# EAGLE board Diagrama-Eduproto (EAGLE 7.5.0)
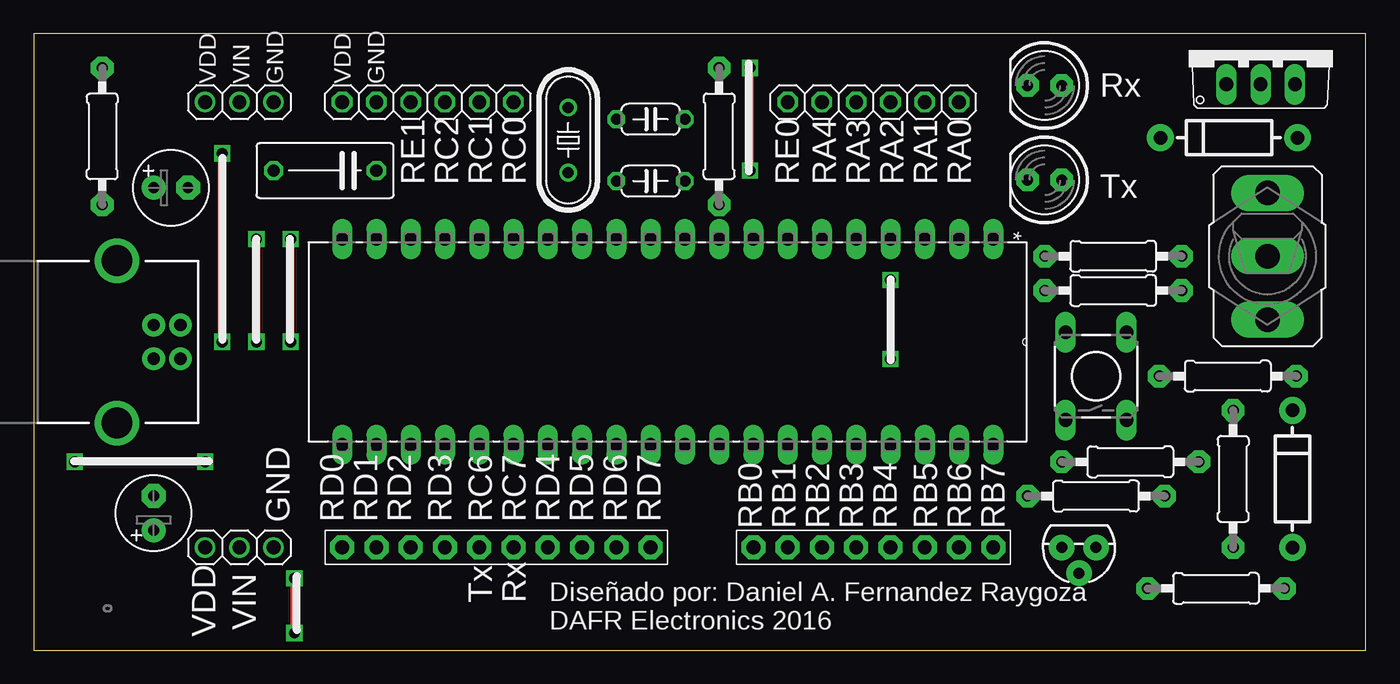
[diagram p0: board, top side]
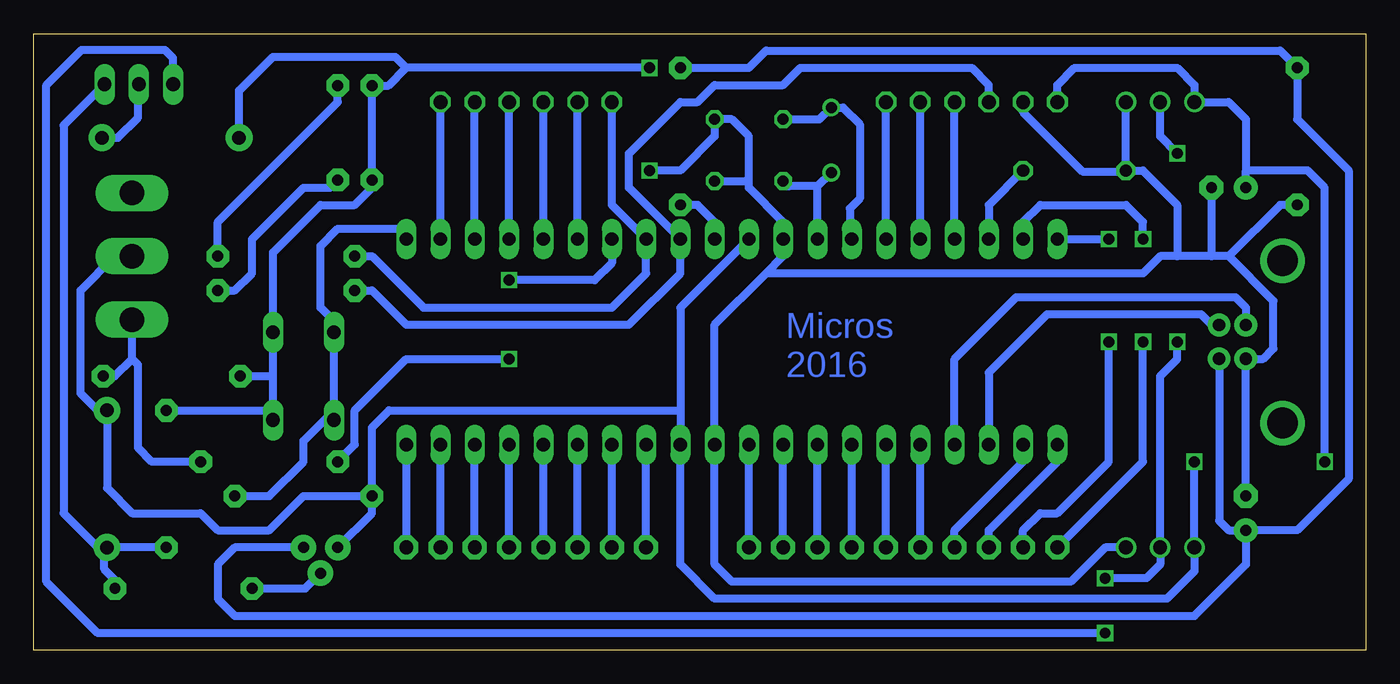
[diagram p1: board, bottom side, seen from below]

Size 98.73 x 45.71 mm. Coordinates in mm from the lower left corner, seen from the top.
Outline: 0,0 98.73,0 98.73,45.71 0,45.71 0,0
Copper layers (1*16): Top 0.035mm / dielectric 1.5mm / Bottom 0.035mm
Design rules "default": minimum track width 10mil, minimum drill 24mil, track to track 8mil, track to pad 8mil, pad to pad 8mil, via to via 8mil, smd to smd 8mil, copper to edge 40mil, drill to drill 8mil, minimum pad ring 10mil, minimum via ring 8mil, stop-mask expansion 4mil, vias tented up to drill 0mil, thermal gap 10mil

## Footprints (pad centres in the part's own frame; a part is rotated, then mirrored left to right if it is on the bottom)
E2,5-6 = drill 0.813 pad 1.778: + -1.27,0 | drill 0.813 pad 1.778 octagon: - 1.27,0
C050-024X044 = drill 0.813 octagon: 1 -2.54,0; 2 2.54,0
C075-042X103 = drill 0.914 octagon: 1 -3.81,0; 2 3.81,0
DIODE-1N4001 = drill 1 pad 1.981: A -5.08,0; C 5.08,0
TO220V = drill 1.016 long: 1 -2.54,-2.54; 2 0,-2.54; 3 2.54,-2.54
USB-B-PTH = drill 0.914 pad 1.676: D+ 0,1.25; D- 1.981,1.25; GND 0,-1.25; VBUS 1.981,-1.25 | drill 2.286: S1 -2.718,-6.02; S2 -2.718,6.02
1X08-BIG = drill 1.016 pad 1.778 octagon: 1 -8.89,0; 2 -6.35,0; 3 -3.81,0; 4 -1.27,0; 5 1.27,0; 6 3.81,0; 7 6.35,0; 8 8.89,0
1X06 = drill 1.016 octagon: 1 -6.35,0; 2 -3.81,0; 3 -1.27,0; 4 1.27,0; 5 3.81,0; 6 6.35,0
1X03 = drill 1.016: 1 -2.54,0; 2 0,0; 3 2.54,0
LED5MM = drill 0.813 pad 1.676 octagon: A -1.27,0; K 1.27,0
HC49/S = drill 0.813: 1 -2.413,0; 2 2.413,0
TO-92 = drill 0.813 pad 1.88: 1 -1.27,0; 2 0,1.905; 3 1.27,0
0207/10 = drill 0.813 pad 1.676 octagon: 1 -5.08,0; 2 5.08,0
M9040P = drill 1.803 long: 1 0,4.699; 2 0,0; 3 0,-4.699
DIP254P1524X635-40 = drill 0.991 long: 1 -15.24,48.26; 2 -15.24,45.72; 3 -15.24,43.18; 4 -15.24,40.64; 5 -15.24,38.1; 6 -15.24,35.56; 7 -15.24,33.02; 8 -15.24,30.48; 9 -15.24,27.94; 10 -15.24,25.4; 11 -15.24,22.86; 12 -15.24,20.32; 13 -15.24,17.78; 14 -15.24,15.24; 15 -15.24,12.7; 16 -15.24,10.16; 17 -15.24,7.62; 18 -15.24,5.08; 19 -15.24,2.54; 20 -15.24,0; 21 0,0; 22 0,2.54; 23 0,5.08; 24 0,7.62; 25 0,10.16; 26 0,12.7; 27 0,15.24; 28 0,17.78; 29 0,20.32; 30 0,22.86; 31 0,25.4; 32 0,27.94; 33 0,30.48; 34 0,33.02; 35 0,35.56; 36 0,38.1; 37 0,40.64; 38 0,43.18; 39 0,45.72; 40 0,48.26
TAC-SWITCH-PTH = drill 1.016 pad 1.524 long: 1 -3.251,2.261; 2 3.251,2.261; 3 -3.251,-2.261; 4 3.251,-2.261
1X10-BIG = drill 1.016 pad 1.778 octagon: 1 -11.43,0; 2 -8.89,0; 3 -6.35,0; 4 -3.81,0; 5 -1.27,0; 6 1.27,0; 7 3.81,0; 8 6.35,0; 9 8.89,0; 10 11.43,0

## Placement (x,y rotation side)
C1  10uF  [E2,5-6]  8.89,10.16 90 top
C2  1uF  [E2,5-6]  10.16,34.29 0 top
C3  22pF  [C050-024X044]  45.72,39.37 0 top
C4  22pF  [C050-024X044]  45.72,34.79 0 top
C5  220nF  [C075-042X103]  21.59,35.56 180 top
D1  [DIODE-1N4001]  88.59,38 180 top
D2  [DIODE-1N4001]  93.3,12.7 90 top
IC1  7805TV  [TO220V]  90.94,44.5 0 top
JP1  USB-B  [USB-B-PTH]  8.89,22.86 0 top
JP2  [1X08-BIG]  62.23,7.62 0 top
JP4  [1X06]  62.23,40.64 180 top
JP5  [1X06]  29.21,40.64 180 top
JP6  [1X03]  15.24,40.64 0 top
JP7  [1X03]  15.24,7.62 0 top
LED1  [LED5MM]  74.93,34.87 180 top
LED2  [LED5MM]  74.93,41.87 180 top
Q1  4MHz  [HC49/S]  39.62,37.83 90 top
Q2  [TO-92]  77.47,7.62 180 top
R1  1K  [0207/10]  88.9,12.7 270 top
R2  1K  [0207/10]  87.63,4.58 180 top
R3  100K  [0207/10]  5.08,38.1 90 top
R4  100K  [0207/10]  50.8,38.1 270 top
R6  330  [0207/10]  80.01,26.67 180 top
R7  330  [0207/10]  80.01,29.21 180 top
R8  10K  [0207/10]  88.5,20.32 180 top
R9  4.7K  [0207/10]  78.74,11.43 0 top
R10  10K  [0207/10]  81.28,13.97 180 top
S2  [M9040P]  91.44,29.21 180 top
U$1  PIC18F4553-I/P  [DIP254P1524X635-40]  22.86,15.24 270 top
U$2  TACTILE-SWITCH-PTH  [TAC-SWITCH-PTH]  78.74,20.32 90 top
U$3  PINHD-1X10  [1X10-BIG]  34.29,7.62 0 top
U$4  [LOGO]  1.75,2.75 0 top

## Library data of the parts
C1-C5 JP2 JP4-JP7 LED1 LED2 R1-R4 R6-R10 U$3 = adafruit
D1 D2 Q2 = SparkFun-DiscreteSemi
IC1 = linear
JP1 = SparkFun-Connectors; PROD_ID: CONN-08278
Q1 = adafruit; OC_FARNELL: 1667008; OC_NEWARK: unknown
S2 = switch
U$1 = PIC 18F4553; DESCRIPTION: USB Microcontrollers; MPN: PIC18F4553-I/P; OC_FARNELL: 1579608; OC_NEWARK: 54M5025; PACKAGE: DIP-40; SUPPLIER: Microchip
U$2 = GeekAmmo
U$4 = microchip

## Nets
AUTORUN: R10.2 U$1.7
D+: JP1.D+ U$1.24
D-: JP1.D- U$1.23
EN: Q2.2 R2.2
GND: C1.- C2.- C3.2 C4.2 C5.2 D1.C JP1.GND JP5.5 JP6.3 JP7.3 LED1.K LED2.K R1.1 R3.1 R8.2 U$1.12 U$1.31 U$2.3 U$2.4
N$2: D1.A IC1.2
N$3: R8.1 R10.1 S2.1
N$4: D2.A IC1.3 R1.2 R2.1
N$11: LED1.A R6.1
N$12: LED2.A R7.1
OSC1: C4.1 Q1.1 U$1.13
OSC2: C3.1 Q1.2 U$1.14
RA0: JP4.1 U$1.2
RA1: JP4.2 U$1.3
RA2: JP4.3 U$1.4
RA3: JP4.4 U$1.5
RA4: JP4.5 U$1.6
RB0: JP2.1 U$1.33
RB1: JP2.2 U$1.34
RB2: JP2.3 U$1.35
RB3: JP2.4 U$1.36
RB4: JP2.5 U$1.37
RB5: JP2.6 U$1.38
RB6: JP2.7 U$1.39
RB7: JP2.8 U$1.40
RC0: JP5.1 U$1.15
RC1: JP5.2 U$1.16
RC2: JP5.3 U$1.17
RC6: U$1.25 U$3.5
RD0: U$1.19 U$3.1
RD1: U$1.20 U$3.2
RD2: U$1.21 U$3.3
RD3: U$1.22 U$3.4
RD4: U$1.27 U$3.7
RD5: U$1.28 U$3.8
RD6: U$1.29 U$3.9
RD7: U$1.30 U$3.10
RESET: R9.2 U$1.1 U$2.1 U$2.2
RXLED: JP4.6 R7.2 U$1.8
RXPLL: U$1.26 U$3.6
SENSEUSB: R4.2 U$1.10
TXLED: JP5.4 R6.2 U$1.9
VBUS: C1.+ JP1.VBUS Q2.1 R3.2 R4.1
VDD: C2.+ D2.C JP5.6 JP6.1 JP7.1 Q2.3 R9.1 S2.2 U$1.11 U$1.32
VIN: IC1.1 JP6.2 JP7.2
VUSB: C5.1 U$1.18

## Tracks (layer width: path | path; a pad name or v marks a point on that pad's centre or on a via)
AUTORUN  (via drill 0.8)
  Top 0.61: v63.5,27.44 v63.5,21.59
  Bottom 0.61: U$1.7 55.88,28.71 57.15,27.44 v63.5,27.44 | R10.2 74.93,15.24 74.93,17.78 71.12,21.59 v63.5,21.59
D+
  Bottom 0.61: U$1.24 30.48,21.59 25.9,26.17 9.66,26.17 8.89,25.4 JP1.D+
D-
  Bottom 0.61: JP1.D- 11.41,24.11 12.2,24.9 23.63,24.9 27.94,20.59 U$1.23
EN
  Bottom 0.61: R2.2 78.61,4.58 Q2.2
GND  (via drill 0.8)
  Top 0.61: v53.09,35.56 v53.09,43.18
  Bottom 0.61: U$2.3 81,17.78 | 81,17.78 81,20.32 | 81,20.32 U$2.4 81,29.49 77.47,33.02 74.93,33.02 73.66,34.29 LED1.K LED2.K 72.43,41.87 71.12,43.18 | 45.72,35 45.72,34.29 43.18,31.75 U$1.12 43.18,29.21 44.45,27.94 | 45.72,35 45.72,38.1 46.99,39.37 C3.2 48.26,38.1 50.8,35.56 v53.09,35.56 | 44.45,27.94 48.26,24.13 U$1.31 48.26,6.35 46.99,5.08 21.86,5.08 19.32,7.62 JP7.3 | 13.97,29.21 13.97,33.02 16.51,35.56 C5.2 | 10.16,29.21 6.85,25.9 6.85,22.36 7.6,21.61 JP1.GND C1.- | 10.16,29.21 11.43,29.21 | 11.43,29.21 13.97,29.21 | 13.97,29.21 15.24,29.21 16.51,27.94 44.45,27.94 | R1.1 81,17.78 | v53.09,43.18 71.12,43.18 | C2.- 11.43,29.21 | R3.1 6.35,33.02 10.16,29.21 | R8.2 81,20.32 | D1.C 83.51,41.49 81,44 71.94,44 71.12,43.18 | C5.2 JP6.3 | JP5.5 25.4,39.9 21,35.5 17.84,35.5 C5.2 | C4.2 45.93,34.79 45.72,35
N$2
  Bottom 0.61: D1.A 92.5,38 91,39.5 91,41.9 IC1.2
N$3
  Bottom 0.61: R10.1 89.97,13.97 91,15 91,21.15 91.44,21.59 | R8.1 92.71,20.32 91.44,21.59 | 91.44,21.59 S2.1
N$4
  Bottom 0.61: R1.2 D2.A | D2.A 93.98,7.62 96.52,10.16 96.52,38.92 IC1.3 | R2.1 92.71,5.21 93.5,6 93.5,7.42 D2.A
N$11
  Bottom 0.61: R6.1 83.82,26.67 82.55,27.94 82.55,30.48 78.74,34.29 76.78,34.29 LED1.A
N$12
  Bottom 0.61: R7.1 85.09,31.75 76.2,40.64 LED2.A
OSC1
  Bottom 0.61: U$1.13 40.64,34.4 | 40.64,34.4 Q1.1 | 40.64,34.4 42.79,34.4 C4.1
OSC2
  Bottom 0.61: C3.1 40.49,39.37 Q1.2 38.74,40.24 37.5,39 37.5,33.5 38.25,32.75 38.25,30.63 U$1.14
RA0
  Bottom 0.61: U$1.2 JP4.1
RA1
  Bottom 0.61: U$1.3 JP4.2
RA2
  Bottom 0.61: U$1.4 JP4.3
RA3
  Bottom 0.61: U$1.5 JP4.4
RA4
  Bottom 0.61: U$1.6 JP4.5
RB0
  Bottom 0.61: JP2.1 U$1.33
RB1
  Bottom 0.61: JP2.2 U$1.34
RB2
  Bottom 0.61: JP2.3 U$1.35
RB3
  Bottom 0.61: JP2.4 U$1.36
RB4
  Bottom 0.61: JP2.5 U$1.37
RB5
  Bottom 0.61: JP2.6 U$1.38
RB6
  Bottom 0.61: JP2.7 U$1.39
RB7
  Bottom 0.61: U$1.40 JP2.8
RC0
  Bottom 0.61: U$1.15 JP5.1
RC1
  Bottom 0.61: U$1.16 JP5.2
RC2
  Bottom 0.61: U$1.17 JP5.3
RC6
  Bottom 0.61: U$3.5 U$1.25
RD0  (via drill 0.8)
  Top 0.61: v16.51,22.86 v16.51,30.48
  Bottom 0.61: v16.51,22.86 16.51,13.97 U$3.1 | U$1.19 25.4,31.75 24.13,33.02 17.78,33.02 16.51,31.75 v16.51,30.48
RD1  (via drill 0.8)
  Top 0.61: v19.05,22.86 v19.05,30.48
  Bottom 0.61: v19.05,22.86 19.05,13.97 22.86,10.16 24.13,10.16 25.4,8.89 U$3.2 | U$1.20 v19.05,30.48
RD2
  Bottom 0.61: U$3.3 27.94,8.89 22.86,13.97 U$1.21
RD3
  Bottom 0.61: U$3.4 30.48,8.89 25.4,13.97 U$1.22
RD4
  Bottom 0.61: U$3.7 U$1.27
RD5
  Bottom 0.61: U$3.8 U$1.28
RD6
  Bottom 0.61: U$3.9 U$1.29
RD7
  Bottom 0.61: U$3.10 U$1.30
RESET
  Bottom 0.61: U$1.1 71.39,31.25 76.2,31.25 77.47,29.98 77.47,25.4 76.48,24.41 U$2.2 76.48,17.78 | U$2.1 76.48,17.78 | R9.2 81.28,11.43 78.74,13.97 78.74,15.52 76.48,17.78
RXLED
  Bottom 0.61: R7.2 73.66,29.21 69.85,25.4 55.88,25.4 53.34,27.94 U$1.8 55.88,33.02 JP4.6
RXPLL
  Bottom 0.61: U$3.6 U$1.26
SENSEUSB
  Bottom 0.61: U$1.10 48.26,31.75 49.53,33.02 R4.2
TXLED
  Bottom 0.61: R6.2 73.66,26.67 71.12,24.13 54.61,24.13 50.8,27.94 U$1.9 54.61,34.29 54.61,36.83 50.8,40.64 49.53,40.64 48.26,41.91 43.18,41.91 41.91,43.18 29.21,43.18 27.94,41.91 JP5.4
VBUS
  Bottom 0.61: R4.1 45.72,43.18 44.45,44.45 6.35,44.45 R3.2 5.08,39.37 1.27,35.56 1.27,12.7 5.08,8.89 C1.+ | Q2.1 83.82,7.62 85.09,6.35 85.09,3.81 83.82,2.54 12.7,2.54 8.89,6.35 C1.+ | JP1.VBUS 10.87,9.6 10.16,8.89 C1.+
VDD  (via drill 0.8)
  Top 0.61: v12.7,13.97 v3.04,13.97
  Bottom 0.61: U$1.11 50.8,25.4 50.8,17.78 | 50.8,17.78 U$1.32 50.8,6.35 48.26,3.81 14.74,3.81 12.7,5.85 JP7.1 v12.7,13.97 | 50.8,17.78 72.39,17.78 73.66,16.51 R9.1 | Q2.3 73.66,10.16 R9.1 | v3.04,13.97 3.04,34.29 4.31,35.56 8.89,35.56 | R9.1 78.74,11.43 81.28,8.89 85.09,8.89 86.36,10.16 91.44,10.16 93.3,12.02 D2.C 93.98,17.78 95.25,19.05 95.25,26.67 92.71,29.21 S2.2 | 8.89,35.56 8.89,39.37 10.16,40.64 JP6.1 12.7,41.91 13.97,43.18 21.59,43.18 22.86,41.91 JP5.6 | C2.+ 8.89,35.56
VIN  (via drill 0.8)
  Top 0.61: v13.97,22.86 v13.97,36.83 | v19.32,5.33 v19.32,1.27
  Bottom 0.61: v13.97,22.86 13.97,21.59 15.24,20.32 JP7.2 15.24,6.35 16.26,5.33 v19.32,5.33 | v13.97,36.83 15.24,38.1 JP6.2 | v19.32,1.27 93.98,1.27 97.79,5.08 97.79,41.91 95.2,44.5 89,44.5 88.4,43.9 IC1.1
VUSB
  Bottom 0.61: C5.1 27.94,33.02 U$1.18

## Text on the board
Bottom: Micros / 2016
tNames: VDD | VIN | GND | VDD | GND | Rx | RE1 | RC2 | RC1 | RC0 | RE0 | RA4 | RA3 | RA2 | RA1 | RA0 | Tx | GND | RD0 | RD1 | RD2 | RD3 | RC6 | RC7 | RD4 | RD5 | RD6 | RD7 | RB0 | RB1 | RB2 | RB3 | RB4 | RB5 | RB6 | RB7 | Tx | Rx | VIN | Diseñado por: Daniel A. Fernandez Raygoza / DAFR Electronics 2016 | VDD